# Altium PCB PCB1.PcbDoc
Units mm, origin at the board's own origin, x right, y up, seen from the top; angles counter-clockwise.
Board outline 69.24 x 27.43 mm, 2 copper layers (Top Layer, Bottom Layer); 15 components, 13 nets, 72 pads, 14 vias.
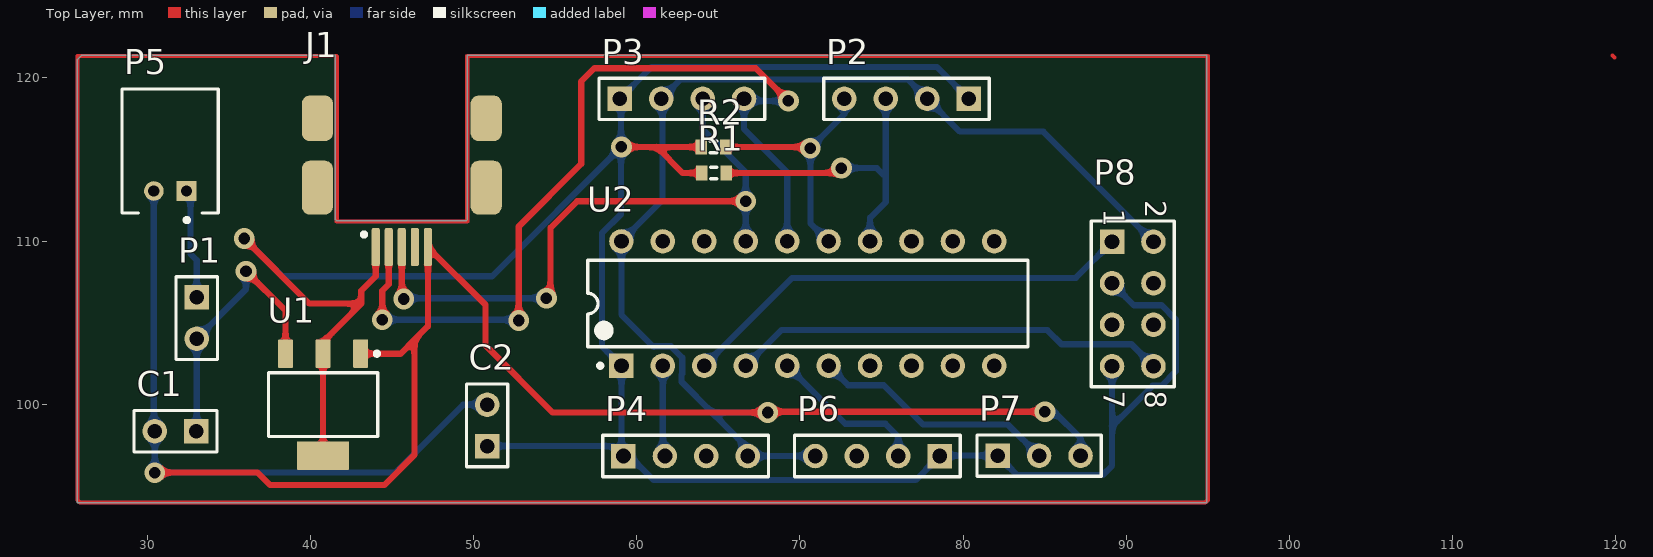
[diagram p0: Top Layer view]
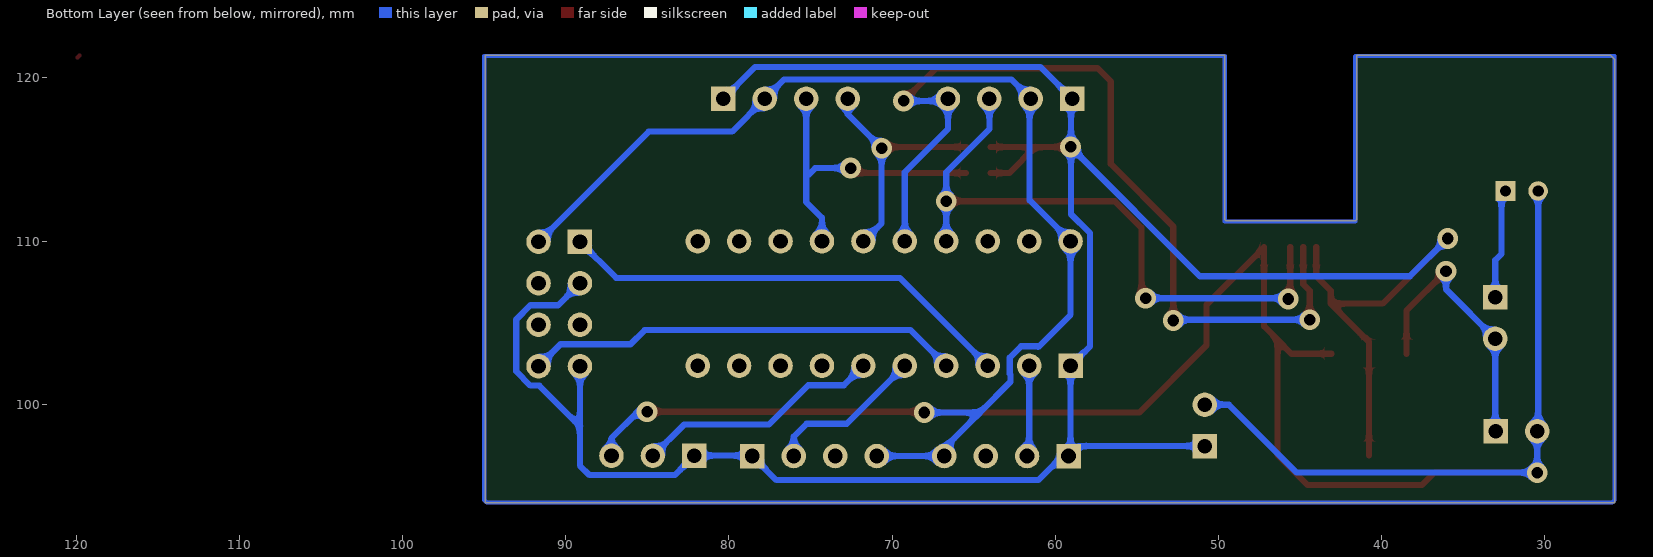
[diagram p1: Bottom Layer view, seen from below]

## Layer stack, top to bottom
Top Solder: solder mask 0.0102, Solder Resist, Dk 3.5
Top Layer: signal copper 0.0356
Dielectric 1: dielectric 0.32, FR-4, Dk 4.8
Bottom Layer: signal copper 0.0356
Bottom Solder: solder mask 0.0102, Solder Resist, Dk 3.5

## Board outline
25.705,93.955 25.705,121.133 25.933,121.361 25.959,121.387 41.529,121.387 41.529,111.303 41.58,111.252 49.53,111.252 49.606,111.328 49.606,121.387 94.945,121.387 94.945,93.955

## Design rules (kind name [scope] priority, off if disabled: settings)
Clearance Clearance_1 [All] p1: gap=0.254 ignorepadtopadclearanceinfootprint=FALSE
Clearance [All] p2: gap=0.254 ignorepadtopadclearanceinfootprint=FALSE except(0: Arc-Hole Track-Hole SMDPad-Hole THPad-Hole Via-Hole Fill-Hole Poly-Hole Region-Hole Text-Hole)
PolygonConnect [All] p1: connectstyle=Relief reliefconductorwidth=0.254 reliefentries=4 polygonreliefangle="90 Angle" airgapwidth=0.254
RoomDefinition Embebidos [InComponentClass('Embebidos')] p1: confinementstyle=ConfineIn formatcopy=TRUE lockcomponents=FALSE outline 0,0 50.8,0 50.8,25.4 0,25.4
RoutingVias [All] p1: holewidth=0.711 width=1.27 viastyle="Through Hole" minholewidth=0.711 minwidth=1.27 maxholewidth=0.711 maxwidth=1.27
SolderMaskExpansion [All] p1: expansion=0.102
Width [All] p1: maxlimit=0.508 minlimit=0.254 preferedwidth=0.381 minimp=50.000000 maximp=50.000000 favimp=50.000000
30 further rules are at their usual default settings.

## Components (designator, comment, footprint, x,y, rotation, side; value= is the part's Value field where it differs from the comment)
C1 "10uF" HDR1X2 32.995,98.349 r180 top
C2 "10uF" HDR1X2 50.825,97.434 r90 top
J1 "10057202-R00LF" FCI-10057202-R00LF_V 45.593,113.665 r90 top
P1 "Header 2" HDR1X2 33.02,106.553 r270 top
P2 "S_BMP180" HDR1X4 80.34,118.72 r180 top
P3 "Header 4" HDR1X4 58.953,118.72 r0 top
P4 "S_HL69" HDR1X4 59.182,96.825 r0 top
P5 "S2B-PH-K-S(LF)(SN)" JST-S2B-PH-K-S_V 31.394,115.519 r180 top
P6 "S_LUZ" HDR1X4 78.562,96.825 r180 top
P7 "S_DHT11" HDR1X3 82.118,96.85 r0 top
P8 "ESP8266" HDR2X4 89.129,109.957 r270 top
R1 "Res3" J1-0603 64.719,114.173 r180 top value=10K
R2 "Res3" J1-0603 64.694,115.773 r180 top value=10K
U1 "LM1117MPX-3.3" DCY0004A_N 40.767,99.974 r270 top
U2 "MSP430G2553IN20" N0020A 70.485,106.172 r90 top

## Footprints (in the part's own frame and the unit in brackets; to place one, negate y for a bottom-side part, rotate by r counter-clockwise, add the part's x,y. Pads: shape width x height; smd on the part's side, far side on the other; paste and mask are expansions set on the pad)
DCY0004A_N [mm] "SOT223, 4-Leads, Body 6.7x3.7mm, Pitch 2.3mm, IPC Medium Density"
  rrect11% 1.75x0.9 smd: 1(-3.125,2.3) 2(-3.125,0) 3(-3.125,-2.3)
  rrect6% 1.75x3.2 smd: 4(3.125,0)
  silkscreen extent -3.25,-3.35 1.95,3.43, body extent -3.5,-3.25 3.5,3.25, height 1.62
FCI-10057202-R00LF_V [mm] "Connector, USB Mini-B, Sinking Type, SMT, 5 Position, Right Angle"
  rrect50% 2.35x0.5 smd paste+0.038 mask+0.038: 1(-4.03,1.6) 2(-4.03,0.8) 3(-4.03,0)
  rrect50% 2.35x0.5 smd paste+0.038 mask+0: 4(-4.03,-0.8) 5(-4.03,-1.6)
  rrect50% 3.302x1.905 smd paste+0.038 mask+0: 6(-0.388,-5.175) 8(-0.388,5.175)
  rrect50% 2.794x1.905 smd paste+0.038 mask+0: 7(3.863,-5.175) 9(3.863,5.175)
  silkscreen extent -3.39,2.19 -3.14,2.44, body extent -4.21,-5.9 6.86,5.9, height 1.41
HDR1X2 [mm] "Connector; Header; 2 Position"
  rect 1.5x1.5 hole 0.9: 1(0,0)
  round 1.5 hole 0.9: 2(2.54,0)
  silkscreen extent -1.27,-1.27 3.81,1.27
HDR1X3 [mm] "Connector; Header; 3 Position"
  rect 1.5x1.5 hole 0.9: 1(0,0)
  round 1.5 hole 0.9: 2(2.54,0) 3(5.08,0)
  silkscreen extent -1.27,-1.27 6.35,1.27
HDR1X4 [mm] "Connector; Header; 4 Position"
  rect 1.5x1.5 hole 0.9: 1(0,0)
  round 1.5 hole 0.9: 2(2.54,0) 3(5.08,0) 4(7.62,0)
  silkscreen extent -1.27,-1.27 8.89,1.27
HDR2X4 [mm] "Connector; Header; 4x2 Position"
  rect 1.5x1.5 hole 0.9: 1(0,0)
  round 1.5 hole 0.9: 2(0,2.54) 3(2.54,0) 4(2.54,2.54) 5(5.08,0) 6(5.08,2.54) 7(7.62,0) 8(7.62,2.54)
  silkscreen extent -1.27,-1.27 8.89,3.81
J1-0603 [mm] "Chip Resistor, Body 1.6x0.8mm, IPC High Density"
  rect 0.7x0.9 smd: 1(-0.75,0) 2(0.75,0)
  silkscreen extent -0.2,-0.35 0.2,0.35, body extent -0.85,-0.48 0.85,0.48, height 0.9
JST-S2B-PH-K-S_V [mm] "THD, 2-Leads, Body 7.6x5.9mm, Pitch 2mm"
  rect 1.2x1.2 hole 0.7: 1(-1,2.45)
  round 1.2 hole 0.7: 2(1,2.45)
  silkscreen extent -2.95,-3.8 2.95,4.35, body extent -2.95,-3.8 2.95,3.8, height 4.8
N0020A [mm] "DIP, 20-Leads, Body 26.9x6.6mm, Pitch 2.54mm"
  rect 1.5x1.5 hole 0.9: 1(-3.81,11.43)
  round 1.5 hole 0.9: 2(-3.81,8.89) 3(-3.81,6.35) 4(-3.81,3.81) 5(-3.81,1.27) 6(-3.81,-1.27) 7(-3.81,-3.81) 8(-3.81,-6.35) 9(-3.81,-8.89) 10(-3.81,-11.43) 11(3.81,-11.43) 12(3.81,-8.89) 13(3.81,-6.35) 14(3.81,-3.81) 15(3.81,-1.27) 16(3.81,1.27) 17(3.81,3.81) 18(3.81,6.35) 19(3.81,8.89) 20(3.81,11.43)
  silkscreen extent -3.93,-13.5 2.65,13.5, body extent -3.95,-13.45 3.95,13.45, height 5.08

## Part data
C1 C2: library part "Header 2", "Header, 2-Pin", LatestRevisionDate=17-Jul-2002, LatestRevisionNote="Re-released for DXP Platform.", Publisher="Altium Limited"
J1: library part CMP-0397-00001-1, "Connector Mini USB, Right Angle, Receptacle, Type B", Manufacturer="FCI Electronics", ComponentLink1Description="Manufacturer URL", ComponentLink1URL=http://portal.fciconnect.com/, ComponentLink2Description=Datasheet, ComponentLink2URL=http://portal.fciconnect.com/Comergent//fci/documentation/gs-12-421.pdf, DatasheetVersion="Rev. A, 12/2006", Mounting Technology="Surface Mount", PackageDescription="Connector, USB Mini-B, Sinking Type, SMT, 5 Position, Right Angle", PackageReference=10057202-R00LF, PartNumber=10057202-R00LF
P1: "Header, 2-Pin", LatestRevisionDate=17-Jul-2002, LatestRevisionNote="Re-released for DXP Platform.", Publisher="Altium Limited"
P2 P4 P6: library part "Header 4", "Header, 4-Pin", LatestRevisionDate=17-Jul-2002, LatestRevisionNote="Re-released for DXP Platform.", Publisher="Altium Limited"
P3: "Header, 4-Pin", LatestRevisionDate=17-Jul-2002, LatestRevisionNote="Re-released for DXP Platform.", Publisher="Altium Limited"
P5: library part CMP-1755-00004-1, "Male Header, Pitch 2 mm, 1 x 2 Position, Height 4.8 mm, Tail Length 3.4 mm, -25 to 85 degC, RoHS, Bulk", Capacitance="10 uF", Case\Package=Radial, Max Operating Temperature="85 degC", Min Operating Temperature="-40 degC", Package Quantity=200, Tolerance=20%, Voltage Rating="50 V", ComponentLink1Description=Datasheet, ComponentLink1URL=http://www.jst-mfg.com/product/pdf/eng/ePH.pdf, DatasheetVersion=Dec-12, Diameter="5 mm", Height="11 mm", Lead Pitch="2 mm", Length="11 mm", Mount="Through Hole", PackageDescription="Male Header, Pitch 2 mm, 1 x 2 Position, Height 4.8 mm, Tail Length 3.4 mm", PackageReference=S2B-PH-K-S, Packaging=Bulk, Pins=2, Radiation Hardening=No, REACH SVHC="No SVHC", RoHSCompliant=true, Voltage Rating (DC)="50 V"
P7: library part "Header 3", "Header, 3-Pin", LatestRevisionDate=17-Jul-2002, LatestRevisionNote="Re-released for DXP Platform.", Publisher="Altium Limited"
P8: library part "Header 4X2", "Header, 4-Pin, Dual row", LatestRevisionDate=17-Jul-2002, LatestRevisionNote="Re-released for DXP Platform.", Publisher="Altium Limited"
R1 R2: "Resistor", LatestRevisionDate=29-May-2009, LatestRevisionNote="IPC-7351 Footprint Added.", PackageDescription="Chip Resistor", PackageReference=J1-0603, Published=8-Jun-2000, Publisher="Altium Limited"
U1: library part CMP-0062-01659-4, "800mA Low-Dropout Linear Regulator, 4-pin SOT-223", Manufacturer="Texas Instruments", PackageTopMarking=XYTT*N05A, PowerWise=N, Code_IPC=SOT223-4, Code_JEDEC=TO-261-AA, ComponentLink1Description="Datasheet URL", ComponentLink1URL=http://www.ti.com/general/docs/lit/getliterature.tsp?genericPartNumber=LM1117-N&fileType=pdf, CompType="LDO IC", High-Reliability=Y, PackageDescription="Molded SOT-223, 6.50 x 3.56 x 1.6mm Body, 4 Lead, 2.3mm Pitch", PackageReference=DCY0004A, PartNumber=LM1117MPX-3.3, PinCount=4, RoHS=N
U2: library part CMP-0365-00184-2, "16 MHz Mixed Signal Microcontroller with 16 KB Flash, 512 B SRAM and 24 GPIOs, -40 to 85 degC, 20-pin DIP (N), Pb-Free (RoHS)", Frequency(MHz)=16, Manufacturer="Texas Instruments", Temp Sensor=Yes, ADC="10-bit SAR", ADC Channels=8, Brown Out Reset=Yes, Cap touch I/O=Yes, Code_JEDEC=MS-001, Comparators=Yes, ComponentLink1Description="Manufacturer URL", ComponentLink1URL=http://www.ti.com/, ComponentLink2Description=Datasheet, ComponentLink2URL=http://www.ti.com/general/docs/lit/getliterature.tsp?genericPartNumber=MSP430G2553&fileType=pdf, ComponentLink3Description="Package Specification", ComponentLink3URL=http://www.ti.com/litv/pdf/mpds177g, DatasheetVersion=SLAS735G, Eco-Plan="Pb-Free (RoHS)", Flash(KB)=16, GPIO=24, Mounting Technology="Through Hole", PackageDescription="20-Pin Plastic In-Line, Body 25.40 x 6.35 mm, Pitch 2.54 mm", PackageReference=N0020A, PackageVersion=4040049/E, PartNumber=MSP430G2553IN20, SRAM(B)=512, SubFamily="Value Line", Timers - 16-bit=2, USCI_A (UART/LIN/IrDA/SPI)=1, USCI_B (I2C & SPI)=1, Watchdog=Yes

## Via types
v1: diameter 1.27, hole 0.711, Top Layer to Bottom Layer, 14 vias

## Nets (pads, with @x,y where several pads share a name; then routed paths per layer and width w, separated by ;. In a path a pad name is that pad's centre, name@x,y a point inside that pad or via, vN(x,y) a via of type N, cw(c..) or ccw(c..) an arc to the next point about the centre after c; other vN are vias at no path point)
3P3: C2.1 J1.1 P2.1 P3.1 P4.1 P6.1 P7.1 P8.3 P8.7 R1.2 R2.2 U1.2 U1.4 U2.1 | length 164.3
  Top Layer w0.381: v1(35.941,110.16) 39.928,106.172 43.103,106.172 ; U1.4 U1.2 40.767,103.836 43.103,106.172 ; J1.1 43.993,107.849 43.103,106.959 43.103,106.172 ; v1(59.055,115.773) 61.214,115.773 ; R2.2 61.214,115.773 ; R1.2 62.814,114.173 61.214,115.773
  Bottom Layer w0.381: v1(35.941,110.16) 38.252,107.848 51.13,107.848 v1@59.03,115.748 ; C2.1 58.572,97.434 P4.1@59.055,96.952 ; P3.1 60.909,120.675 78.384,120.675 P2.1 ; P3.1@59.03,118.72 v1@59.03,115.748 ; v1(59.055,115.773) v1@59.03,115.748 ; P8.7 89.129,98.654 ; P8.3 90.474,106.071 92.163,106.071 93.04,105.194 93.04,102.019 92.163,101.142 91.617,101.142 89.129,98.654 ; v1@59.03,115.748 59.03,111.646 57.86,110.477 57.86,103.557 U2.1 P4.1@59.055,96.952 ; P4.1@59.055,96.952 P4.1 59.563,96.825 61.036,95.352 77.089,95.352 P6.1 78.588,96.85 P7.1 83.313,95.656 88.544,95.656 89.129,96.241 89.129,98.654
BATT: P1.1 P5.1 | length 6.8
  Bottom Layer w0.381: P5.1 32.639,112.825 32.639,109.22 33.02,108.839 P1.1
DHT11: P7.2 U2.6 | length 15.2
  Bottom Layer w0.381: U2.6 72.95,101.167 75.134,101.167 77.546,98.755 82.753,98.755 P7.2
GND: C1.2 C2.2 J1.5 P2.2 P3.2 P4.4 P5.2 P6.4 P7.3 P8.2 U1.1 U2.20 | length 190
  Top Layer w0.381: v1(30.455,95.809) 36.754,95.809 37.516,95.047 44.526,95.047 46.368,96.888 46.368,103.95 ; U1.1 45.518,103.099 46.368,103.95 ; v1(85.014,99.543) 68.58,99.543 68.326,99.797 v1(68.021,99.492) 54.839,99.492 50.724,103.607 50.724,106.104 J1.5 47.193,104.775 46.368,103.95
  Bottom Layer w0.381: P5.2 30.394,98.409 C1.2 v1(30.455,95.809) 45.187,95.809 49.352,99.974 C2.2 ; P3.2 62.688,119.914 64.528,119.914 ; P3.2@61.57,118.72 61.57,112.497 U2.20 59.055,105.499 61.049,103.505 61.1,103.557 62.09,103.557 62.79,102.857 62.79,101.867 62.738,101.816 62.738,101.371 64.618,99.492 ; 64.529,119.913 66.078,119.913 ; 66.079,119.914 76.606,119.914 P2.2 79.807,116.713 84.912,116.713 P8.2 ; v1(68.021,99.492) 64.618,99.492 ; P6.4 P4.4 66.802,97.307 64.618,99.492 ; v1(85.014,99.543) 85.573,99.543 87.198,97.917 P7.3
HL69: P4.2 U2.2 | length 5.6
  Bottom Layer w0.381: U2.2 61.595,96.952 P4.2
LUZ: P6.2 U2.5 | length 9.8
  Bottom Layer w0.381: U2.5 72.771,98.806 75.235,98.806 76.022,98.019 P6.2
RST: J1.2 P3.4 U2.16 | length 55.7
  Top Layer w0.381: v1(44.399,105.181) 44.399,106.959 44.793,107.353 J1.2 ; v1(52.756,105.131) 52.756,110.896 56.591,114.732 56.591,119.786 57.404,120.599 67.285,120.599 v1(69.291,118.593)
  Bottom Layer w0.381: v1(44.399,105.181) 52.705,105.181 v1(52.756,105.131) ; U2.16 69.215,114.224 66.573,116.865 P3.4 66.7,118.593 v1(69.291,118.593)
RX_MC: P8.1 U2.3 | length 28.1
  Bottom Layer w0.381: U2.3 69.52,107.747 86.919,107.747 P8.1
RX_MW: P8.8 U2.4 | length 26.8
  Bottom Layer w0.381: U2.4 68.859,104.546 85.166,104.546 86.031,103.682 90.323,103.682 P8.8
SCL: P2.3 R1.1 U2.14 | length 19.1
  Top Layer w0.381: R1.1 72.238,114.173 v1(72.542,114.478)
  Bottom Layer w0.381: v1(72.542,114.478) 74.701,114.478 75.133,114.046 ; U2.14 74.295,111.43 75.26,112.395 P2.3
SDA: P2.4 R2.1 U2.15 | length 15.3
  Top Layer w0.381: R2.1 70.561,115.773 v1(70.637,115.697)
  Bottom Layer w0.381: U2.15 70.637,111.1 v1(70.637,115.697) 72.72,117.78 P2.4
TEST: J1.3 P3.3 U2.17 | length 39.1
  Top Layer w0.381: J1.3 45.593,106.883 45.923,106.553 45.822,106.451 v1(45.72,106.451) ; v1(54.458,106.502) 54.712,106.756 54.712,110.82 56.337,112.446 v1(66.675,112.446)
  Bottom Layer w0.381: v1(45.72,106.451) 45.771,106.502 v1(54.458,106.502) ; P3.3 64.033,116.865 66.675,114.224 v1(66.675,112.446) U2.17
VCC3P7: C1.1 P1.2 U1.3 | length 17.1
  Top Layer w0.381: v1(36.043,108.153) 38.467,105.729 U1.3
  Bottom Layer w0.381: C1.1 33.02,98.374 P1.2 36.043,107.036 v1(36.043,108.153)
pads on no net: J1.4 J1.6 J1.7 J1.8 J1.9 P4.3 P6.3 P8.4 P8.5 P8.6 U2.7 U2.8 U2.9 U2.10 U2.11 U2.12 U2.13 U2.18 U2.19
copper on no net: | length 0.2
  Top Layer w0.254: 119.812,121.387 119.939,121.26

## Other copper
Multi-Layer:
  lines w0.254: 25.705,94.132 25.857,93.98 94.844,93.98 94.996,94.132 94.996,121.336 49.606,121.336 49.606,111.201 41.605,111.201 41.605,121.31 41.58,121.336 41.402,121.336 25.705,121.336 25.705,94.132

## Text inside footprints (layer, text, board x,y; h text height)
P8: Top Overlay "8" at 91.161,100.813 h1.27 r270; Top Overlay "7" at 88.621,100.813 h1.27 r270; Top Overlay "1" at 88.621,111.989 h1.27 r270; Top Overlay "2" at 91.161,112.497 h1.27 r270